# Altium PCB TuneIt.PcbDoc
Units mil, origin at the board's own origin, x right, y up, seen from the top; angles counter-clockwise.
Board outline 3346.46 x 2362.2 mil, 2 copper layers (Top Layer, Bottom Layer); 27 components, 28 nets, 121 pads, 0 vias.
Unrouted connection lines stored in the file: 21.
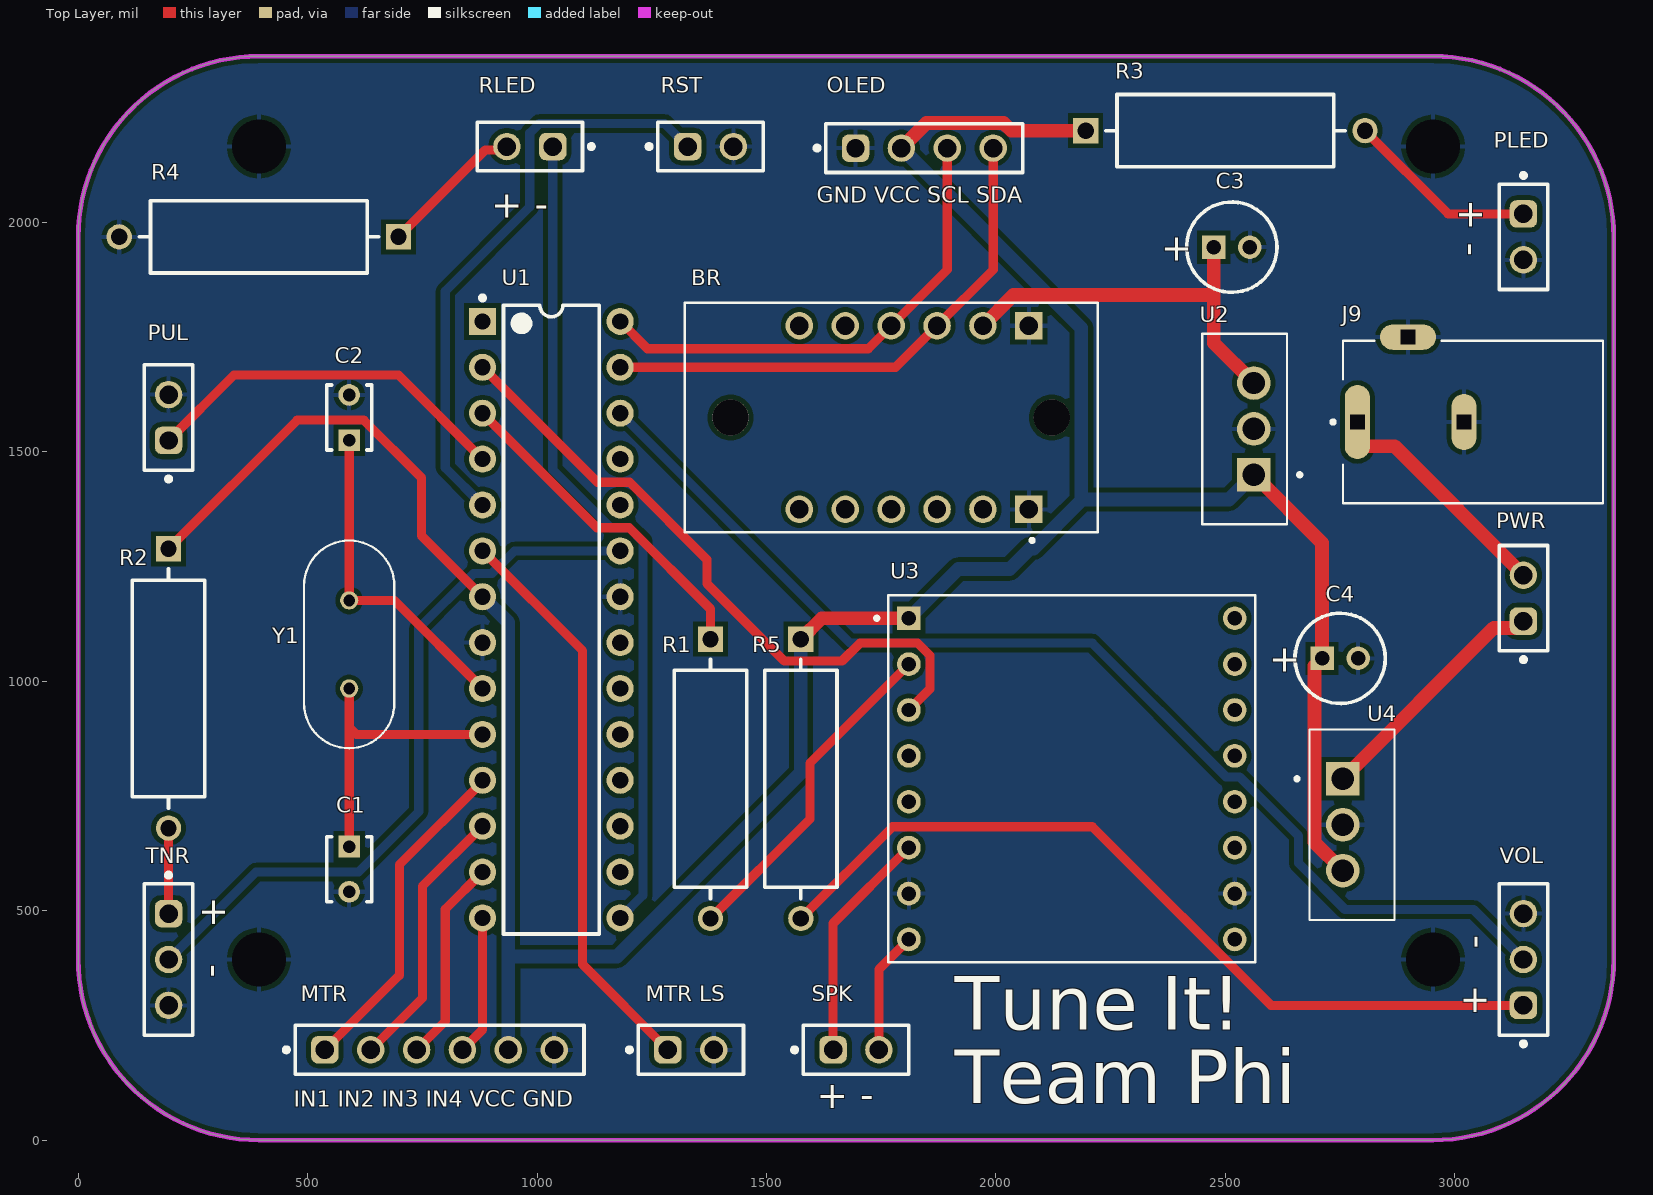
[diagram p0: Top Layer view]
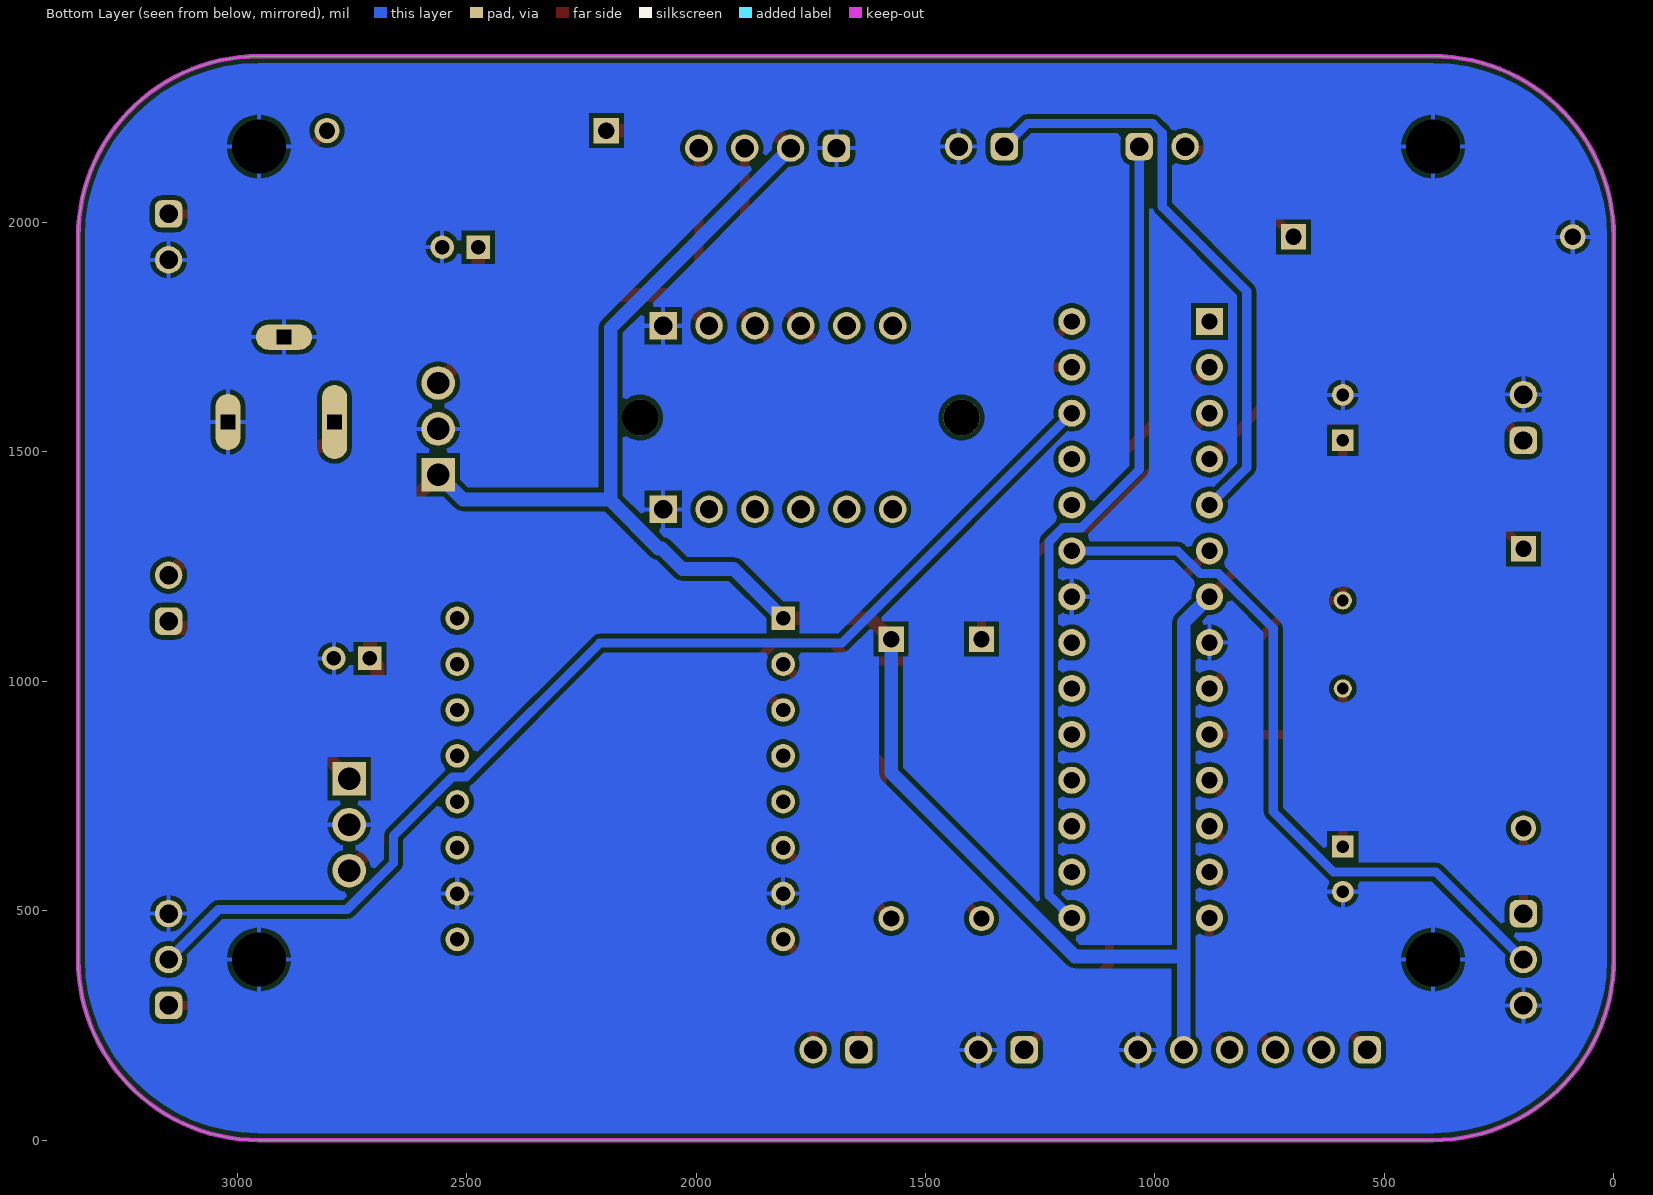
[diagram p1: Bottom Layer view, seen from below]
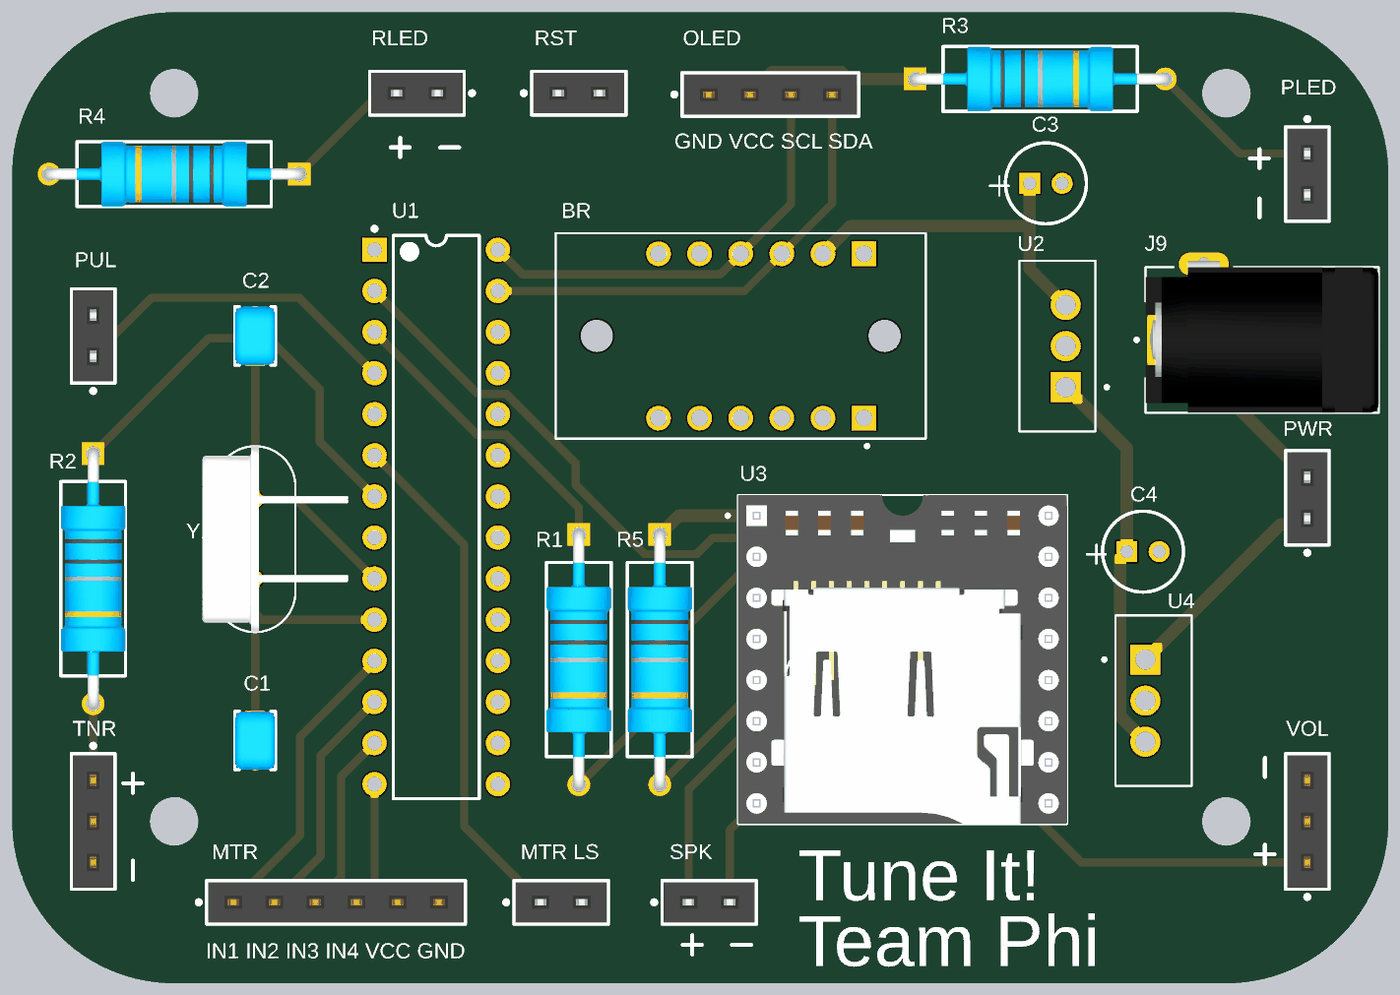
[diagram p2: 3D render of the assembled board from above, using the file's embedded part models]

## Layer stack, top to bottom
Top Solder: solder mask 0.4, Solder Resist, Dk 3.5
Top Layer: signal copper 1.4
Dielectric 1: dielectric 12.6, FR-4, Dk 4.8
Bottom Layer: signal copper 1.4
Bottom Solder: solder mask 0.4, Solder Resist, Dk 3.5

## Board outline
0,393.7 0,1968.5 cw(c393.7,1968.5) 393.7,2362.2 2952.76,2362.2 cw(c2952.76,1968.5) 3346.46,1968.5 3346.46,393.7 cw(c2952.76,393.7) 2952.76,0 393.7,0 cw(c393.7,393.7)

## Design rules (kind name [scope] priority, off if disabled: settings)
Clearance [All] p1: gap=10 ignorepadtopadclearanceinfootprint=FALSE
PolygonConnect [All] p1: connectstyle=Relief reliefconductorwidth=10 reliefentries=4 polygonreliefangle="90 Angle" airgapwidth=10
RoutingVias [All] p1: holewidth=28 width=50 viastyle="Through Hole" minholewidth=28 minwidth=50 maxholewidth=28 maxwidth=50
SolderMaskExpansion [All] p1: expansion=4 istentingtop=FALSE
SupplyNets "Schematic Supply Nets" [InNet('GND')] p1: voltage=0.000
Width [All] p1: maxlimit=30 minlimit=10 preferedwidth=20
30 further rules are at their usual default settings.

## Components (designator, comment, footprint, x,y, rotation, side; value= is the part's Value field where it differs from the comment)
BR "SEN-13963" SEN-13963 1771.65,1574.8 r90 top
C1 "22nF" FP-RCE0DB-MFG 590.55,590.55 r270 top
C2 "22nF" FP-RCE0DB-MFG 590.55,1574.8 r90 top
C3 "ECA1HM100" CAPPR55-200-1100X500X1200 2514,1946 r0 top value=10µF
C4 "ECA1HM100" CAPPR55-200-1100X500X1200 2750,1050 r0 top value=10µF
J9 "54-00130" TENSILITY_54-00130 3020,1565 r90 top
MTR "MTR" 61300611821 787.4,196.85 r0 top (schematic designator J2)
"MTR LS" "MLS" 61300211821 1335,196.85 r0 top (schematic designator J6)
OLED "OLED" 61300411821 1844,2162 r0 top (schematic designator J1)
PLED "PLD" 61300211821 3149.61,1968.5 r270 top (schematic designator J10)
PUL "PUL" 61300211821 196.85,1574.8 r90 top (schematic designator J5)
PWR "PWR" 61300211821 3149.61,1181.1 r90 top (schematic designator J8)
R1 "VR37000001204JA100" FP-VR37-MFG 1377.95,787.4 r270 top
R2 "VR37000001204JA100" FP-VR37-MFG 196.85,984.25 r270 top
R3 "VR37000001204JA100" FP-VR37-MFG 2500,2200 r0 top
R4 "VR37000001204JA100" FP-VR37-MFG 393.7,1968.5 r180 top
R5 "VR37000001204JA100" FP-VR37-MFG 1574.8,787.4 r270 top
RLED "RLD" 61300211821 984.25,2165.35 r180 top (schematic designator J12)
RST "RST" 61300211821 1377.95,2165.35 r0 top (schematic designator J4)
SPK "SPK" 61300211821 1695,196.85 r0 top (schematic designator J7)
TNR "TNR" 61300311821 196.85,393.7 r270 top (schematic designator J3)
U1 "ATMEGA328P-PU" ATML-28P3 1031.1,1134.25 r0 top
U2 "LM2937ET-3.3/NOPB" TO254P1054X470X1955-3 2562,1550 r90 top
U3 "DFR0299" MODULE_DFR0299 2165.35,787.4 r0 top
U4 "LM2937ET-3.3/NOPB" TO254P1054X470X1955-3 2755.91,687.4 r270 top
VOL "VOL" 61300311821 3149.61,393.7 r90 top (schematic designator J11)
Y1 "ABL-16.000MHz-B1U-T" XTAL_HC49P488W46L1150T500H350 590.55,1080.32 r270 top

## Footprints (in the part's own frame and the unit in brackets; to place one, negate y for a bottom-side part, rotate by r counter-clockwise, add the part's x,y. Pads: shape width x height; smd on the part's side, far side on the other; paste and mask are expansions set on the pad)
61300211821 [mm] "Socket Header, Pitch 2.54 mm, THT, Vertical, single row, 2p"
  rrect50% 1.52x1.52 hole 1.02: 1(-1.27,0)
  round 1.52 hole 1.02: 2(1.27,0)
  silkscreen extent -3.52,-1.35 2.92,1.35, body extent -2.79,-1.25 2.79,1.25, height 8.55
61300311821 [mm] "Socket Header, Pitch 2.54 mm, THT, Vertical, single row, 3p"
  rrect50% 1.52x1.52 hole 1.02: 1(-2.54,0)
  round 1.52 hole 1.02: 2(0,0) 3(2.54,0)
  silkscreen extent -4.79,-1.35 4.19,1.35, body extent -4.06,-1.25 4.06,1.25, height 8.55
61300411821 [mm] "Socket Header, Pitch 2.54 mm, THT, Vertical, single row, 4p"
  rrect50% 1.52x1.52 hole 1.02: 1(-3.81,0)
  round 1.52 hole 1.02: 2(-1.27,0) 3(1.27,0) 4(3.81,0)
  silkscreen extent -6.06,-1.35 5.46,1.35, body extent -5.33,-1.25 5.33,1.25, height 8.55
61300611821 [mm] "Socket Header, Pitch 2.54 mm, THT, Vertical, single row, 6p"
  rrect50% 1.52x1.52 hole 1.02: 1(-6.35,0)
  round 1.52 hole 1.02: 2(-3.81,0) 3(-1.27,0) 4(1.27,0) 5(3.81,0) 6(6.35,0)
  silkscreen extent -8.6,-1.35 8,1.35, body extent -7.87,-1.25 7.87,1.25, height 8.55
ATML-28P3 [mm] "DIP, 28-Leads, Body 34.8x7.2mm, Pitch 2.54mm"
  rect 1.5x1.5 hole 0.9: 1(-3.81,16.51)
  round 1.5 hole 0.9: 2(-3.81,13.97) 3(-3.81,11.43) 4(-3.81,8.89) 5(-3.81,6.35) 6(-3.81,3.81) 7(-3.81,1.27) 8(-3.81,-1.27) 9(-3.81,-3.81) 10(-3.81,-6.35) 11(-3.81,-8.89) 12(-3.81,-11.43) 13(-3.81,-13.97) 14(-3.81,-16.51) 15(3.81,-16.51) 16(3.81,-13.97) 17(3.81,-11.43) 18(3.81,-8.89) 19(3.81,-6.35) 20(3.81,-3.81) 21(3.81,-1.27) 22(3.81,1.27) 23(3.81,3.81) 24(3.81,6.35) 25(3.81,8.89) 26(3.81,11.43) 27(3.81,13.97) 28(3.81,16.51)
  silkscreen extent -3.93,-17.4 2.65,17.93, body extent -3.95,-17.4 3.95,17.4, height 4.58
CAPPR55-200-1100X500X1200 [mm] "THD, 2-Leads, Dia 5mm, Pin Spacing 2mm"
  rect 1.3x1.3 hole 0.8: 1(-1,0)
  round 1.3 hole 0.8: 2(1,0)
  silkscreen extent -2.5,-2.5 2.5,2.5, body extent -2.5,-2.5 2.45,2.5, height 12
FP-RCE0DB-MFG [mm]
  rect 1.2x1.2 hole 0.7 paste-2539.97 mask+0: 1(-1.25,0)
  round 1.2 hole 0.7 paste-2539.97 mask+0: 2(1.25,0)
  silkscreen extent -1.8,-1.25 1.8,1.25, body extent -1.95,-1.35 1.95,1.35, height 0.25
FP-VR37-MFG [mm]
  rect 1.4x1.4 hole 0.9 paste-2539.97 mask+0: 1(-7.73,0)
  round 1.4 hole 0.9 paste-2539.97 mask+0: 2(7.73,0)
  silkscreen extent -6.63,-2 6.63,2, body extent -8.53,-2.1 8.53,2.1, height 0.25
MODULE_DFR0299 [mil]
  rect 51.5x51.5 / inner round 51.5 / far side rect 51.5x51.5 hole 31.5: 1(-355,350)
  round 51.5 hole 31.5: 2(-355,250) 3(-355,150) 4(-355,50) 5(-355,-50) 6(-355,-150) 7(-355,-250) 8(-355,-350) 9(355,-350) 10(355,-250) 11(355,-150) 12(355,-50) 13(355,50) 14(355,150) 15(355,250) 16(355,350)
  silkscreen extent -429,-400 400,400, body extent -400,-400 400,400, height 246
SEN-13963 [mil]
  rect 60x60 hole 40: 1(-200,-300) 7(200,-300)
  round 60 hole 40: 2(-200,-200) 3(-200,-100) 4(-200,0) 5(-200,100) 6(-200,200) 8(200,-200) 9(200,-100) 10(200,0) 11(200,100) 12(200,200)
  round 78.74 hole 78.74 unplated: ""(0,350) ""(0,-350)
  silkscreen extent -272,-450 250,450
TENSILITY_54-00130 [mm]
  oval 4.1x1.4 hole 0.8 square mask+0.05: A(0,5.9)
  oval 3.1x1.4 hole 0.8 square mask+0.05: B(0,0)
  oval 1.4x3.1 hole 0.8 square mask+0.05: C(4.7,3.1)
  silkscreen extent -4.5,-7.7 4.5,7.35, body extent -4.5,-7.7 4.88,6.7, height 10.8
TO254P1054X470X1955-3 [mm]
  rect 1.86x1.86 hole 1.24: 1(-2.54,0)
  round 1.86 hole 1.24: 2(0,0) 3(2.54,0)
  silkscreen extent -5.27,-2.64 5.27,2.86
XTAL_HC49P488W46L1150T500H350 [mm]
  round 1.007 hole 0.657: 1(-2.44,0) 2(2.44,0)
  silkscreen extent -5.75,-2.5 5.75,2.5, body extent -5.75,-3.25 5.75,5.75, height 2.5

## Part data
BR: library part CMP-122-000000-1, "LIS3DH - Accelerometer, 3 Axis Sensor Evaluation Board", Package=None, Availability=Unavailable, Component Type=Standard, Design Item ID=SEN-13963, MF="SparkFun Electronics", MP=SEN-13963, Pin Count=12, Price=None, SnapEDA_Link=https://www.snapeda.com/parts/SEN-13963/SparkFun%20Electronics/view-part/666571/?ref=snap, Source=SnapEDAsch.SchLib
C1 C2: library part CMP-001-00091-1, "CAP CER 10000PF 50V X7R RADIAL"
C3 C4: library part CMP-001-00025-5, "Aluminum Electrolytic Capacitor, 10 uF, +/- 20%, 50 V, -40 to 85 degC, 2-Pin THD, RoHS, Bulk", Capacitor Type=Electrolytic, Case/Package=Radial, Manufacturer=Panasonic, Max Operating Temperature=85°C, Min Operating Temperature=-40°C, Package Description="2-Pin Radial Lead, Dia 5 mm, Height 12 mm", Package Quantity=200, Package Reference=CAPPR55-200-1100X500X1200, Ripple Current=65mA, Tolerance=20%, Voltage Rating=50V, Datasheet URL=https://industrial.panasonic.com/cdbs/www-data/pdf/RDF0000/ABA0000C1218.pdf, Datasheet Version="Rev. 05, 10/2016", Diameter=5mm, Lead Pitch=2mm, Manufacturer URL=http://www.panasonic.com/, Mounting Technology=TH, Packaging=Bulk, Pins=2, Ripple Current (AC)=65mA, RoHS Compliant=True
J9: library part CMP-002-01141-1, "Connector, dc jack 5.5x2.5 mm, PCB mount, 90 degrees, silver plated, thru hole", Case/Package=None, Availability="In Stock", Check_prices=https://www.snapeda.com/parts/54-00130/Tensility+International+Corp/view-part/?ref=eda, Component Type=Standard, Design Item ID=54-00130, MF="Tensility International Corp", MP=54-00130, Pins=3, Price=None, Purchase-URL=https://pricing.snapeda.com/search?q=54-00130&ref=eda, SnapEDA_Link=https://www.snapeda.com/parts/54-00130/Tensility+International+Corp/view-part/?ref=snap, Source=54-00130.SchLib
MTR: library part CMP-002-00277-1, "WR-PHD Socket Header, THT, Vertical, pitch 2.54mm, 1 Row, 6P", Contact Resistance=20mOhm, Manufacturer="Wurth Elektronik", Manufacturer Part Number=61300611821, Operating Temperature Max=125°C, Operating Temperature Min=-40°C, Rated Current=3A, Withstanding Voltage=500V, Working Voltage=250V, Category="Board-to-Board Connectors", Component Type=Standard, ComponentLink1Description="Website Link", ComponentLink1URL=https://www.we-online.com/redexpert/article/61300611821?ad, ComponentLink2Description="Datasheet Link", ComponentLink2URL=https://www.we-online.com/redexpert/spec/61300611821?ad, Design Item ID=61300611821, Gender="Socket Header", Match Code=WR-PHD, Mount="Through Hole", Number of Rows=1, Orientation=Vertical, Packaging=Tray, Pin Count=6, Pins=6, Pitch=2.54mm, Source=WR-PHD.SchLib
"MTR LS" PLED PUL PWR RLED RST SPK: library part CMP-002-00253-1, "WR-PHD Socket Header, THT, Vertical, pitch 2.54mm, 1 Row, 2P", Contact Resistance=20mOhm, Manufacturer="Wurth Elektronik", Manufacturer Part Number=61300211821, Operating Temperature Max=125°C, Operating Temperature Min=-40°C, Rated Current=3A, Withstanding Voltage=500V, Working Voltage=250V, Category="Board-to-Board Connectors", Component Type=Standard, ComponentLink1Description="Website Link", ComponentLink1URL=https://www.we-online.com/redexpert/article/61300211821?ad, ComponentLink2Description="Datasheet Link", ComponentLink2URL=https://www.we-online.com/redexpert/spec/61300211821?ad, Design Item ID=61300211821, Gender="Socket Header", Match Code=WR-PHD, Mount="Through Hole", Number of Rows=1, Orientation=Vertical, Packaging=Tray, Pin Count=2, Pins=2, Pitch=2.54mm, Source=WR-PHD.SchLib
OLED: library part CMP-002-00261-1, "WR-PHD Socket Header, THT, Vertical, pitch 2.54mm, 1 Row, 4P", Contact Resistance=20mOhm, Manufacturer="Wurth Elektronik", Manufacturer Part Number=61300411821, Operating Temperature Max=125°C, Operating Temperature Min=-40°C, Rated Current=3A, Withstanding Voltage=500V, Working Voltage=250V, Category="Board-to-Board Connectors", Component Type=Standard, ComponentLink1Description="Website Link", ComponentLink1URL=https://www.we-online.com/redexpert/article/61300411821?ad, ComponentLink2Description="Datasheet Link", ComponentLink2URL=https://www.we-online.com/redexpert/spec/61300411821?ad, Design Item ID=61300411821, Gender="Socket Header", Match Code=WR-PHD, Mount="Through Hole", Number of Rows=1, Orientation=Vertical, Packaging=Tray, Pin Count=4, Pins=4, Pitch=2.54mm, Source=WR-PHD.SchLib
R1: library part CMP-02408-000054-1, "RES 1.2M OHM 5% 1/2W AXIAL", Case/Package=Conformal, Max Operating Temperature=155°C, Min Operating Temperature=-55°C, Power Rating=500mW, Resistance=1k, Resistance Tolerance=5%, Resistor Type="Metal Film", Temperature Coefficient=200ppm/°C, Voltage Rating=3.5kV, Construction=Cylindrical, Contact Plating=Tin, Diameter=4mm, Length=10mm, Military Standard=Not, Mount="Through Hole", Packaging="Ammo Pack", Radiation Hardening=No, Reach SVHC Compliant=Yes, Termination=Axial, Tolerance=5%, Voltage Rating (DC)=3.5kV
R2 R5: library part CMP-02408-000054-1, "RES 1.2M OHM 5% 1/2W AXIAL", Case/Package=Conformal, Max Operating Temperature=155°C, Min Operating Temperature=-55°C, Power Rating=500mW, Resistance=10k, Resistance Tolerance=5%, Resistor Type="Metal Film", Temperature Coefficient=200ppm/°C, Voltage Rating=3.5kV, Construction=Cylindrical, Contact Plating=Tin, Diameter=4mm, Length=10mm, Military Standard=Not, Mount="Through Hole", Packaging="Ammo Pack", Radiation Hardening=No, Reach SVHC Compliant=Yes, Termination=Axial, Tolerance=5%, Voltage Rating (DC)=3.5kV
R3 R4: library part CMP-02408-000054-1, "RES 1.2M OHM 5% 1/2W AXIAL", Case/Package=Conformal, Max Operating Temperature=155°C, Min Operating Temperature=-55°C, Power Rating=500mW, Resistance=220, Resistance Tolerance=5%, Resistor Type="Metal Film", Temperature Coefficient=200ppm/°C, Voltage Rating=3.5kV, Construction=Cylindrical, Contact Plating=Tin, Diameter=4mm, Length=10mm, Military Standard=Not, Mount="Through Hole", Packaging="Ammo Pack", Radiation Hardening=No, Reach SVHC Compliant=Yes, Termination=Axial, Tolerance=5%, Voltage Rating (DC)=3.5kV
TNR VOL: library part CMP-002-00257-1, "WR-PHD Socket Header, THT, Vertical, pitch 2.54mm, 1 Row, 3P", Contact Resistance=20mOhm, Manufacturer="Wurth Elektronik", Manufacturer Part Number=61300311821, Operating Temperature Max=125°C, Operating Temperature Min=-40°C, Rated Current=3A, Withstanding Voltage=500V, Working Voltage=250V, Category="Board-to-Board Connectors", Component Type=Standard, ComponentLink1Description="Website Link", ComponentLink1URL=https://www.we-online.com/redexpert/article/61300311821?ad, ComponentLink2Description="Datasheet Link", ComponentLink2URL=https://www.we-online.com/redexpert/spec/61300311821?ad, Design Item ID=61300311821, Gender="Socket Header", Match Code=WR-PHD, Mount="Through Hole", Number of Rows=1, Orientation=Vertical, Packaging=Tray, Pin Count=3, Pins=3, Pitch=2.54mm, Source=WR-PHD.SchLib
U1: library part CMP-020-00004-2, "8-Bit Microcontroller with 32 KBytes In-System Programmable Flash, 23 I/Os, -40 to 85 degC, 28-Pin PDIP (28P3), RoHS, Tube", Case/Package=DIP, Manufacturer=Atmel, Max Clock Frequency=20MHz, Max Operating Temperature=85°C, Max Supply Voltage=5.5V, Min Operating Temperature=-40°C, Min Supply Voltage=1.8V, Package Description="28-Pin Plastic Dual Inline Package, Body 34.671 x 7.3025 mm, Pitch 2.54 mm", Package Quantity=14, Package Reference=28P3, Package Version="Rev. B, 09/2001", Datasheet URL=http://www.atmel.com/images/Atmel-8271-8-bit-AVR-Microcontroller-ATmega48A-48PA-88A-88PA-168A-168PA-328-328P_datasheet_Complete.pdf, Datasheet Version="Rev. 8271J, 11/2015", Density=32KB, Ethernet Channels=0, I/Os=23, Interface=USART, Manufacturer URL=http://www.atmel.com/, Mounting Technology=TH, Package URL=http://www.atmel.com/images/Atmel-8271-8-bit-AVR-Microcontroller-ATmega48A-48PA-88A-88PA-168A-168PA-328-328P_datasheet_Complete.pdf, Packaging=Rail/Tube, Pins=28, RAM Size=2KB, RoHS Compliant=True
U2 U4: library part CMP-124-000000-1, Package=None, Availability=Unavailable, Component Type=Standard, Design Item ID=LM2937ET-3.3/NOPB, MP=LM2937ET-3.3/NOPB, Pin Count=3, Price=None, Source=LM2937ET-3.3_NOPB.SchLib
U3: library part CMP-136-000000-1, "- MP3 Player Audio Arduino Platform Evaluation Expansion Board", Package=None, Check_prices=https://www.snapeda.com/parts/DFR0299/DFRobot/view-part/?ref=eda, Component Type=Standard, Design Item ID=DFR0299, MF=DFRobot, MP=DFR0299, Pin Count=16, SnapEDA_Link=https://www.snapeda.com/parts/DFR0299/DFRobot/view-part/?ref=snap, Source=DFR0299.SchLib
Y1: library part CMP-003-00030-1, "16 MHz Â±10ppm Crystal 18pF 40 Ohms HC-49/US", Case/Package="HC-49/US ABRACON", Availability="In Stock", Check_prices=https://www.snapeda.com/parts/ABL-16.000MHz-B1U/Abracon+LLC/view-part/?ref=eda, Component Type=Standard, Design Item ID=ABL-16.000MHz-B1U-T, MF="Abracon LLC", MP=ABL-16.000MHz-B1U, Pins=2, Price=None, Purchase-URL=https://pricing.snapeda.com/search/part/ABL-16.000MHz-B1U/?ref=eda, SnapEDA_Link=https://www.snapeda.com/parts/ABL-16.000MHz-B1U/Abracon+LLC/view-part/?ref=snap, Source=ABL-16.000MHz-B1U-T.SchLib

## Free pads (board coordinates)
  round 78.74 hole 118.11 unplated: 1(393.7,2165.35) 2(2952.76,2165.35) 3(2952.76,393.7) 5(393.7,393.7)

## Nets (pads, with @x,y where several pads share a name; then routed paths per layer and width w, separated by ;. In a path a pad name is that pad's centre, name@x,y a point inside that pad or via, vN(x,y) a via of type N, cw(c..) or ccw(c..) an arc to the next point about the centre after c; other vN are vias at no path point)
+3.3V: BR.8 C3.1 U2.3 | length 862.9
  Top Layer w30: BR.8 2038.54,1841.68 2474.63,1841.68 ; C3.1 2474.63,1841.68 ; U2.3 2474.63,1737.37 2474.63,1841.68
+5V: C4.1 MTR.5 OLED.2 R2.1 R3.1 R5.1 U1.7 U2.1 U3.1 U4.3 | length 6593
  Top Layer w20: R2.1 477.48,1569.21 622.46,1569.21 748.04,1443.63 748.04,1317.31 U1.7
  Top Layer w30: R5.1 1620.47,1137.4 U3.1 ; OLED.2 1848.92,2216.92 2016.75,2216.92 2033.67,2200 R3.1 ; U2.1 2710.63,1301.37 C4.1 2694.29,1033.66 2694.29,649.02 U4.3
  Bottom Layer w30: U1.7 937.4,1127.95 937.4,400 ; MTR.5 937.4,400 ; R5.1 1574.8,800.84 1173.96,400 937.4,400 ; OLED.2 2186.02,1769.98 2186.02,1393.82 ; U3.1 1917.79,1244.83 2029.97,1244.83 2074.78,1289.64 2081.85,1289.64 2186.02,1393.82 ; U2.1 2507.89,1395.89 2188.09,1395.89 2186.02,1393.82
+9V: PWR.1 U4.1 | length 536.1
  Top Layer w30: U4.1 3084.68,1116.18 3134.69,1116.18 PWR.1
GND: "MTR LS.2" BR.1 BR.7 C1.2 C2.2 C3.2 C4.2 J9.B J9.C MTR.6 OLED.1 pad.1 pad.2 pad.3 pad.5 PLED.2 PUL.2 R4.2 RST.2 TNR.3 U1.8 U1.22 U2.2 U3.7 U3.10 U4.2 VOL.3
NetBR_9: BR.9 OLED.4 U1.27 | length 1165.9
  Top Layer w20: U1.27 1781.1,1684.25 BR.9 1994,1897.15 OLED.4
NetBR_10: BR.10 OLED.3 U1.28 | length 1073.8
  Top Layer w20: U1.28 1240.55,1724.8 1721.65,1724.8 BR.10 1894,1897.15 OLED.3
NetC1_1: C1.1 U1.10 Y1.2 | length 641.6
  Top Layer w20: C1.1 590.55,900 ; Y1.2 590.55,900 ; U1.10 606.3,884.25 590.55,900
NetC2_1: C2.1 U1.9 Y1.1 | length 719.3
  Top Layer w20: C2.1 Y1.1 688.98,1176.38 U1.9
NetJ2_1: MTR.1 U1.11 | length 729.8
  Top Layer w20: MTR.1 700,359.45 700,600 881.1,781.1 U1.11
NetJ2_2: MTR.2 U1.12 | length 588.3
  Top Layer w20: MTR.2 750,309.45 750,553.15 U1.12
NetJ2_3: MTR.3 U1.13 | length 446.9
  Top Layer w20: MTR.3 800,259.45 800,503.15 U1.13
NetJ2_4: MTR.4 U1.14 | length 313.6
  Top Layer w20: MTR.4 881.1,240.55 U1.14
  Top Layer w30: MTR.4 MTR.4@837.4,204.93
NetJ3_1: R2.2 TNR.1 | length 186.2
  Top Layer w20: TNR.1 R2.2
NetJ3_2: TNR.2 U1.23 | length 1586.9
  Bottom Layer w19.68: TNR.2 387.95,584.8 610.9,584.8 742.15,716.06 742.15,1115.12 861.91,1234.88 901.55,1234.88 950.92,1284.25 U1.23
NetJ4_1: RST.1 U1.5 | length 1293.3
  Bottom Layer w20: U1.5 800,1465.35 800,1850 984.17,2034.17 984.17,2194.64 1004.81,2215.28 1278.03,2215.28 RST.1
NetJ5_1: PUL.1 U1.4 | length 819.4
  Top Layer w20: PUL.1 339.69,1667.64 697.72,1667.64 U1.4
NetJ6_1: "MTR LS.1" U1.6 | length 1254.7
  Top Layer w20: U1.6 1099.16,1066.19 1099.16,382.69 1285,196.85
NetJ7_1: SPK.1 U3.6 | length 509
  Top Layer w20: SPK.1 1645,472.05 U3.6
NetJ7_2: SPK.2 U3.8 | length 283.6
  Top Layer w20: SPK.2@1739.35,202.5 SPK.2 1745,372.05 U3.8 U3.8@1816,431.75
NetJ8_2: J9.A PWR.2 | length 524.2
  Top Layer w30: J9.A 2787.72,1523.96 2799.32,1512.36 2868.35,1512.36 PWR.2
NetJ10_1: PLED.1 R3.2 | length 420.5
  Top Layer w20: R3.2 2985.83,2018.5 PLED.1
NetJ11_1: R5.2 VOL.1 | length 1819
  Top Layer w20: R5.2 1774.88,683.15 2209.91,683.15 2599.36,293.7 VOL.1
NetJ11_2: U1.26 VOL.2 | length 2496.3
  Bottom Layer w20: U1.26 1682.2,1083.15 2209.91,1083.15 2501.4,791.65 2530.8,791.65 2659.52,662.93 2659.52,603.72 2760.72,502.52 3040.78,502.52 VOL.2
NetJ12_1: RLED.1 U1.15 | length 1806.4
  Bottom Layer w20: RLED.1 1034.25,1461.06 1160.59,1334.72 1200.67,1334.72 1230.63,1304.77 1230.63,533.78 U1.15
NetJ12_2: R4.1 RLED.2 | length 325.8
  Top Layer w20: R4.1 887.26,2157.73 926.63,2157.73 RLED.2
  Top Layer w30: RLED.2@928.54,2159.64 RLED.2
NetR1_1: R1.1 U1.3 | length 739.4
  Top Layer w20: U1.3 1130.63,1334.72 1200.67,1334.72 1377.95,1157.44 R1.1
NetR1_2: R1.2 U3.2 | length 733.4
  Top Layer w20: R1.2 1594.5,699.62 1594.5,821.55 U3.2
NetU1_2: U1.2 U3.3 | length 1435.9
  Top Layer w20: U1.2 1131.57,1433.78 1201.62,1433.78 1370.29,1265.11 1370.29,1212.84 1538.96,1044.17 1664.64,1044.17 1703.62,1083.15 1829.3,1083.15 1856.1,1056.35 1856.1,983.15 U3.3
pads on no net: BR. BR.2 BR.3 BR.4 BR.5 BR.6 BR.11 BR.12 U1.1 U1.16 U1.17 U1.18 U1.19 U1.20 U1.21 U1.24 U1.25 U3.4 U3.5 U3.9 U3.11 U3.12 U3.13 U3.14 U3.15 U3.16

## Polygon pours and split planes (outlines as drawn)
no net on Multi-Layer "NONET_L02_P-001" (solid): 375.1,-2.16 377.26,0 2950,0

## Keep-outs
Keep-Out Layer:
  the board outline again, w10

## Other copper
Bottom Layer:
  region net GND: 170 vertices and 2 holes, not listed, extent 912.76,425.49 1210.24,1264.02
  region net GND: 77 vertices and 144 holes, not listed, extent 15.09,15.09 3331.36,2347.11

## Silkscreen, mask and mechanical layers (free items; w line width, h text height)
Top Overlay:
  text "+ -" at 3010,2050 h60 r270
  text "GND VCC SCL SDA" at 1610,2030.67 h60
  text "+ -" at 900,2010 h60
  text "+   -" at 270,530 h60 r270
  text "+   -" at 3070,270 h60 r90
  text "Tune It!" at 1910,202.04 h200
  text "+ -" at 1610,70 h60
  text "IN1 IN2 IN3 IN4 VCC GND" at 470,60.67 h60
  text "Team Phi" at 1910,42.04 h200

## Text inside footprints (layer, text, board x,y; h text height)
C3: Top Overlay "+" at 2360.14,1916.98 h59.06
C4: Top Overlay "+" at 2596.14,1020.98 h59.06